# Altium PCB carrier_card.PcbDoc (part 2 of 2)
Units mil, origin at the board's own origin, x right, y up, seen from the top; angles counter-clockwise.
Board outline 4010 x 3799.91 mil, 4 copper layers (Top Layer, GND, VCC, Bottom Layer), stack 30.634 mil thick; 96 components, 162 nets, 584 pads, 200 vias.
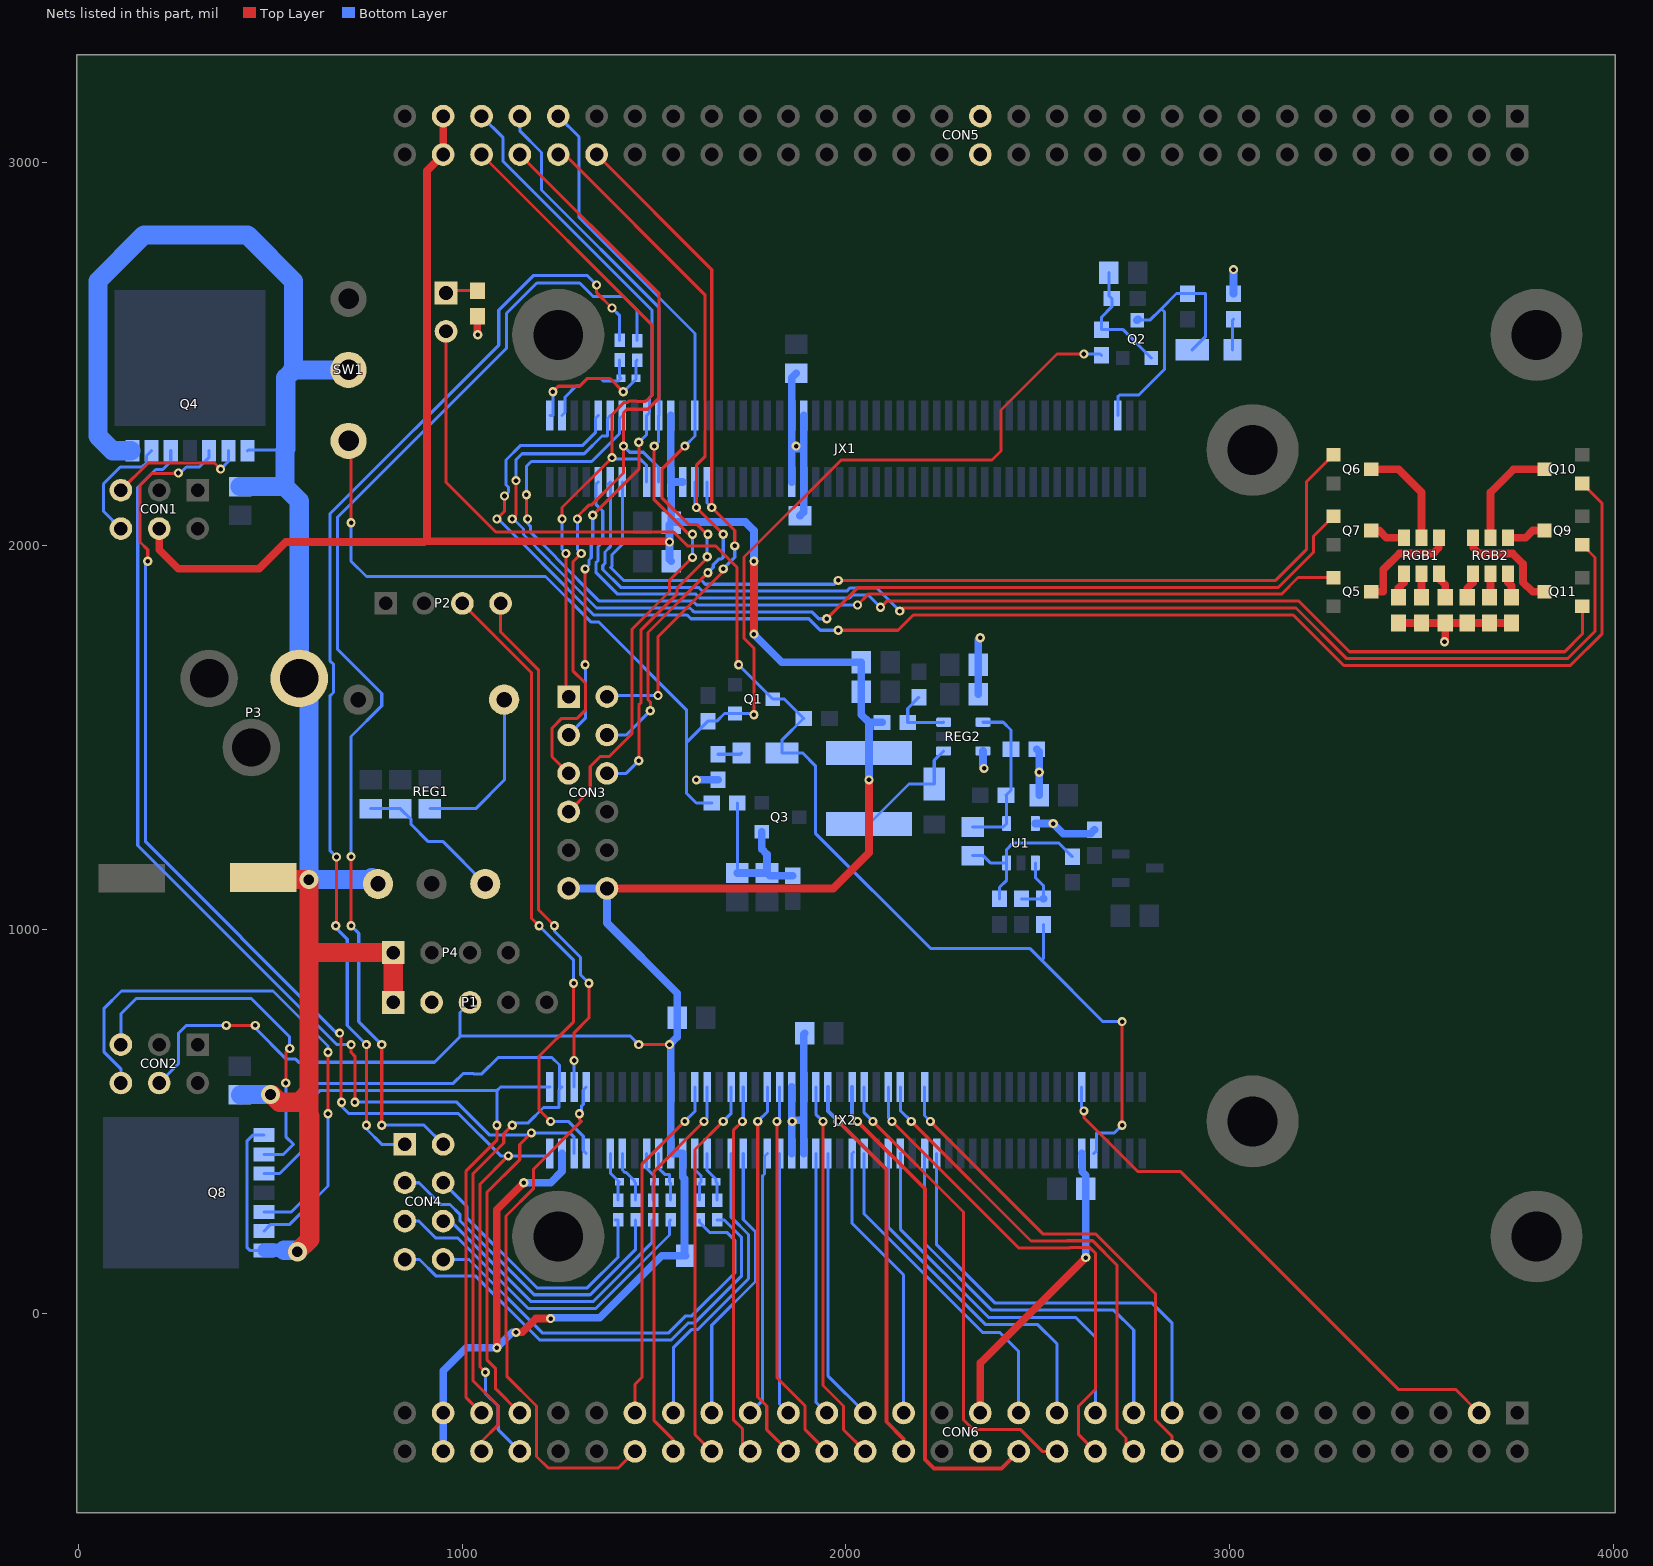
[diagram p4: the nets of this part, all layers, seen from the top]

## Via types
v1: diameter 24, hole 12, Top Layer to Bottom Layer, 192 vias
v2: diameter 50, hole 28, Top Layer to Bottom Layer, 8 vias

## Nets (pads, with @x,y where several pads share a name; then routed paths per layer and width w, separated by ;. In a path a pad name is that pad's centre, name@x,y a point inside that pad or via, vN(x,y) a via of type N, cw(c..) or ccw(c..) an arc to the next point about the centre after c; other vN are vias at no path point) (continued)
JX2_IO13: CON6.19 JX2.36 | length 1170.2
  Bottom Layer w8: JX2.36@2236.22,416.12 2236.22,178.33 2387.54,27 2797,27 2850,-26 CON6.19@2850,-260
JX2_IO14: CON6.20 JX2.37 | length 1297.7
  Top Layer w8: v1(2220,500) 2514,206 2568.23,206 2569.03,206.8 2650.48,206.8 2806.47,50.81 2806.47,-278.03 2850,-321.56 CON6.20@2850,-360
  Bottom Layer w8: JX2.37@2204.72,589.35 2204.72,515.28 v1(2220,500)
JX2_IO15: CON6.21 JX2.38 | length 1088.5
  Bottom Layer w8: JX2.38@2204.72,416.12 2204.72,182.95 2379.67,8 2698,8 2750,-44 CON6.21@2750,-260
JX2_IO16: CON6.22 JX2.41 | length 1296.8
  Top Layer w8: v1(2170,500) 2482,188 2575.68,188 2576.48,188.8 2643.03,188.8 2706.47,125.36 2706.47,-301.56 2730,-325.09 2730,-340 CON6.22@2750,-360
  Bottom Layer w8: JX2.41@2141.73,589.35 2141.73,528.27 v1(2170,500)
JX2_IO17: CON6.23 JX2.42 | length 1029.2
  Bottom Layer w8: JX2.42@2148.38,422.78 JX2.42@2141.73,416.12 2141.73,219.07 2371.8,-11 2599,-11 2650,-62 CON6.23@2650,-260
JX2_IO18: CON6.24 JX2.43 | length 1319.5
  Top Layer w8: v1(2120,500) 2450,170 2583.14,170 2583.94,170.8 2635.57,170.8 2650.8,155.57 2650.8,-197.64 2606.47,-241.97 2606.47,-316.47 CON6.24@2650,-360
  Bottom Layer w8: JX2.43@2110.23,589.35 2110.23,509.77 v1(2120,500)
JX2_IO19: CON6.25 JX2.44 | length 938
  Bottom Layer w8: JX2.44@2110.23,416.12 2110.23,223.7 2363.93,-30 2500,-30 2550,-80 CON6.25@2550,-260
JX2_IO20: CON6.26 JX2.47 | length 1252.2
  Top Layer w8: v1(2070,500) 2306.47,263.53 2306.47,-278.03 2331.97,-303.53 2455.08,-303.53 2511.56,-360 CON6.26@2550,-360
  Bottom Layer w8: JX2.47@2047.24,589.35 2047.24,522.76 v1(2070,500)
JX2_IO21: CON6.27 JX2.48 | length 868.9
  Bottom Layer w8: JX2.48@2047.24,416.12 2047.24,258.41 2355.65,-50 2400,-50 2450,-100 CON6.27@2450,-260
JX2_IO22: CON6.28 JX2.49 | length 1321.6
  Top Layer w10: v1(2030,500) 2205.47,324.53 2205.47,-380.94 2229.06,-404.53 2405.47,-404.53 CON6.28@2450,-360
  Bottom Layer w10: JX2.49@2015.75,589.35 2015.75,514.25 v1(2030,500)
JX2_IO23: CON6.33 JX2.50 | length 737.7
  Bottom Layer w8: JX2.50@2020,420.38 JX2.50@2015.75,416.12 2015.75,234.25 2150,100 CON6.33@2150,-260
JX2_IO24: CON6.34 JX2.53 | length 1031.1
  Top Layer w10: v1(1980,500) 2105.47,374.53 2105.47,-282.97 2150,-327.5 CON6.34@2150,-360
  Bottom Layer w10: JX2.53@1952.75,589.35 1952.75,527.25 v1(1980,500)
JX2_IO25: CON6.35 JX2.54 | length 716.4
  Bottom Layer w8: JX2.54@1952.75,416.12 1952.75,-162.75 CON6.35@2050,-260
JX2_IO26: CON6.36 JX2.55 | length 1002.7
  Top Layer w8: v1(1940,500) 1940,-188.44 1993.53,-241.97 1993.53,-303.53 CON6.36@2050,-360
  Bottom Layer w8: JX2.55@1921.26,589.35 1921.26,518.74 v1(1940,500)
JX2_IO27: CON6.37 JX2.56 | length 688
  Bottom Layer w8: JX2.56@1921.26,416.12 1921.26,-231.26 CON6.37@1950,-260
JX2_IO28: CON6.38 JX2.61 | length 1006
  Top Layer w8: v1(1820,500) 1820,-168.44 1893.53,-241.97 1893.53,-303.53 CON6.38@1950,-360
  Bottom Layer w8: v1(1820,500) 1826.77,506.77 JX2.61@1826.77,589.35
JX2_IO29: CON6.39 JX2.62 | length 685.7
  Bottom Layer w8: JX2.62@1826.77,416.12 1826.77,-236.77 CON6.39@1850,-260
JX2_IO30: CON6.40 JX2.63 | length 993
  Top Layer w8: v1(1770,500) 1770,-218.44 1793.53,-241.97 1793.53,-303.53 CON6.40@1850,-360
  Bottom Layer w8: v1(1770,500) 1795.27,525.27 JX2.63@1795.27,589.35
JX2_IO31: CON6.41 JX2.64 | length 694.9
  Bottom Layer w8: CON6.41@1750,-260 1782,-228 1782,357.13 1787.62,362.75 1787.62,408.47 JX2.64@1795.27,416.12
JX2_IO32: CON6.42 JX2.67 | length 978.1
  Top Layer w8: v1(1730,500) 1706.47,476.47 1706.47,-278.03 1730,-301.56 1730,-340 CON6.42@1750,-360
  Bottom Layer w8: v1(1730,500) 1732.28,502.28 JX2.67@1732.28,589.35
JX2_IO33: CON6.43 JX2.68 | length 736.5
  Bottom Layer w8: CON6.43@1650,-260 1650,-31.5 1764,82.5 1764,212.37 1732.28,244.09 JX2.68@1732.28,416.12
JX2_IO34: CON6.44 JX2.69 | length 1006.4
  Top Layer w8: CON6.44@1650,-360 1606.47,-316.47 1606.47,426.47 v1(1680,500)
  Bottom Layer w8: v1(1680,500) 1700.78,520.78 JX2.69@1700.78,589.35
JX2_IO35: CON6.45 JX2.70 | length 785.4
  Bottom Layer w8: CON6.45@1550,-260 1550,-90 1597,-43 1613.04,-43 1746,89.96 1746,204.91 1700.78,250.13 JX2.70@1700.78,416.12
JX2_IO36: CON6.46 JX2.73 | length 1027.1
  Top Layer w8: CON6.46@1550,-360 1550,-330 1500,-280 1500,370 v1(1630,500)
  Bottom Layer w8: v1(1630,500) 1637.79,507.79 JX2.73@1637.79,589.35
JX2_IO37: CON6.47 JX2.75 | length 914.1
  Top Layer w8: CON6.47@1450,-260 1450,-185.46 1468,-167.46 1468,388 v1(1580,500)
  Bottom Layer w8: v1(1580,500) 1606.3,526.3 JX2.75@1606.3,589.35
JX2_IO38: CON6.48 JX2.93 | length 1376.3
  Top Layer w8: v1(1305.18,520) 1305.18,504.82 1310,500 1186,376 1186,325.51 1114,253.51 1114,-60.77 1116,-62.77 1116,-164.44 1193.53,-241.97 1193.53,-373.53 1223.53,-403.53 1406.47,-403.53 CON6.48@1450,-360
  Bottom Layer w8: v1(1305.18,520) 1310.36,520 1310.36,539.36 1315.18,544.18 1315.18,581.7 JX2.93@1322.83,589.35
JX2_TP00: JX2.94 P2.3 | length 1669.4
  Top Layer w8: P2.3@1000,1850 1180,1670 1180,1030 v1(1200,1010) ; v1(1230,500) 1200,530 1200,670 1290,760 v1(1290,860)
  Bottom Layer w8: v1(1200,1010) 1290,920 v1(1290,860) ; v1(1230,500) 1276.47,500 1315.18,461.29 1315.18,423.78 JX2.94@1322.83,416.12
JX2_TP01: JX2.95 P2.4 | length 1371.9
  Top Layer w8: P2.4@1100,1850 1100,1775.46 1198,1677.46 1198,1052 v1(1240,1010) ; v1(1291.34,658.66) 1291.34,731.34 1330,770 v1(1330,860)
  Bottom Layer w8: v1(1240,1010) 1240,995.46 1308,927.46 1308,882 v1(1330,860) ; JX2.95@1291.34,589.35 v1(1291.34,658.66)
M0_PWM0: CON6.53 JX2.96 Q4.5 | length 3470.4
  Top Layer w8: v1(710,700) 710,680 720,670 v1(720,550) ; CON6.53@1150,-260 1086,-196 1086,-143.23 1064,-121.23 1064,314.67 1149.67,400.33 1149.67,439.67 v1(1180,470)
  Bottom Layer w8: Q4.5@240,2247.87 240,2220 218.99,2198.99 201.01,2198.99 154,2151.97 154,1219.23 673.23,700 v1(710,700) ; v1(720,550) 985.46,550 1071.46,464 1174,464 v1(1180,470) 1280,470 1291.34,458.66 JX2.96@1291.34,416.12
M0_PWM1: CON6.54 JX2.100 Q4.3 | length 3542.6
  Top Layer w8: v1(180,1960) 180,1990 160,2010 160,2157.97 190.56,2188.53 248.03,2188.53 246.56,2190 v1(260,2190) ; v1(680,730) 684,726 684,551.36 v1(685.36,550) ; v1(1060,-154) 1046,-140 1046,336 v1(1120,410) ; v1(260,2190) 260,2184.73 257.37,2187.37 v1(260,2190)
  Bottom Layer w8: v1(180,1960) 174.53,1954.53 174.53,1228.4 672.93,730 v1(680,730) ; v1(260,2190) 260,2184.73 280.58,2205.32 314.52,2205.32 340,2230.8 Q4.3@340,2247.87 ; v1(685.36,550) 680,544.64 704.64,520 990,520 1100,410 v1(1120,410) 1222.22,410 JX2.100@1228.34,416.12 ; v1(1060,-154) 1060,-208.44 1093.53,-241.97 1093.53,-303.53 CON6.54@1150,-360
M1_PWM0: CON6.55 JX2.99 Q8.5 | length 1916.6
  Top Layer w8: CON6.55@1050,-260 1010,-220 1010,371.01 1090,451.01 v1(1090,490)
  Bottom Layer w8: Q8.5@483,263.95 553.95,263.95 602.07,312.07 602.07,553.79 629.28,581 1090,581 ; v1@1093.23,490 v1(1090,490) 1090,581 ; JX2.99@1227.69,590 JX2.99@1228.34,589.35 1099.35,589.35 1091,581 1090,581
M1_PWM1: CON6.56 JX2.97 Q8.3 | length 2185.4
  Top Layer w8: CON6.56@1050,-360 1050,-334.31 1093.53,-290.78 1093.53,-241.97 1028,-176.44 1028,363.55 1108,443.55 1108,468 v1(1130,490)
  Bottom Layer w8: Q8.3@483,363.95 523.95,363.95 580,420 580,560 619,599 976.24,599 1001.6,624.36 1028.87,624.36 1029.23,624 1050.77,624 1093.43,666.66 1233.34,666.66 1253.19,646.81 1253.19,589.35 JX2.97@1259.84,589.35 1252.19,581.7 1252.19,535.98 1211.74,535.98 1171.76,496 1136,496 v1(1130,490)
MIC_CM_CLK: CON3.7 CON5.50 JX1.74 | length 1847.9
  Top Layer w8: CON5.50@1350,3020 1650,2720 v1(1650,2100) 1710,2040 v1(1710,2000) ; v1(1510,1610) 1510,1763.23 1680,1933.23 v1(1680,1940)
  Bottom Layer w8: CON3.7@1377,1607 1380,1610 v1(1510,1610) ; JX1.74@1637.79,2166.62 1637.79,2112.21 v1(1650,2100) ; v1(1680,1940) 1710,1970 v1(1710,2000)
MIC_DATA0: CON3.4 CON5.53 JX1.81 | length 2163.3
  Top Layer w8: CON3.4@1277,1307 1333.47,1363.47 1333.47,1425.03 1358.97,1450.53 1382.09,1450.53 1442,1510.44 1442,1782.91 1540,1880.91 1540,1910 v1(1600,1970) ; v1(1500,2260) 1500,2120 1590,2030 v1(1600,2030)
  Bottom Layer w8: CON5.53@1150,3120 1150,3081.56 1206.47,3025.08 1206.47,2927.43 1512.88,2621.01 1512.88,2340.93 JX1.81@1511.81,2339.85 1511.81,2271.81 v1(1500,2260) ; v1(1600,1970) v1(1600,2030)
MIC_DATA1: CON3.3 CON5.54 JX1.82 | length 2143.9
  Top Layer w8: CON5.54@1150,3020 1512.88,2657.11 1512.88,2385.85 1483.04,2356 1429.35,2356 1420,2346.65 v1(1420,2260) 1420,2190 1336,2106 1329.23,2106 1300,2076.77 v1(1300,2070) ; CON3.3@1277,1407 1233.47,1450.53 1233.47,1525.03 1258.97,1550.53 1299.38,1550.53 1320.53,1571.67 1320.53,1642.33 1288,1674.85 1288,1958 v1(1310,1980)
  Bottom Layer w8: v1(1300,2070) 1300,1990 v1(1310,1980) ; v1(1420,2260) 1436,2244 1471.95,2244 1511.81,2204.14 JX1.82@1511.81,2166.62
MIC_DATA2: CON3.2 CON5.55 JX1.83 | length 1888
  Top Layer w8: v1(1320,1690) v1(1320,1940) ; v1(1340,2080) 1460,2200 v1(1460,2270)
  Bottom Layer w8: CON5.55@1050,3120 1106.47,3063.53 1106.47,3001.97 1494.88,2613.56 1494.88,2393.3 1487.96,2386.38 1487.96,2347.5 JX1.83@1480.31,2339.85 1480.31,2290.31 v1(1460,2270) ; CON3.2@1277,1507 1320.53,1550.53 1320.53,1689.47 v1(1320,1690) ; v1(1320,1940) 1330,1950 1330,1963.23 1336,1969.23 1336,2005.68 1340,2009.68 v1(1340,2080)
MIC_DATA3: CON3.1 CON5.56 JX1.84 | length 1875.9
  Top Layer w8: CON5.56@1050,3020 1494.88,2575.11 1494.88,2393.3 1478.79,2377.21 1475.96,2377.21 1474.75,2376 1454.87,2376 1453.67,2377.21 1433.98,2377.21 1430.77,2374 1421.89,2374 1390,2342.11 v1(1390,2230) 1260,2100 v1(1260,2070) ; v1(1270,1980) 1270,1614 CON3.1@1277,1607
  Bottom Layer w8: v1(1260,2070) 1260,1990 v1(1270,1980) ; v1(1390,2230) 1394,2226 1464,2226 1480.31,2209.69 JX1.84@1480.31,2166.62
MIC_SCL: CON3.9 CON5.51 JX1.75 | length 2098.6
  Top Layer w8: v1(1460,1440) 1460,1585.77 1466,1591.77 1466,1781.46 1560,1875.46 1560,1890 1638.23,1968.23 v1(1638.23,1971.77) ; v1(1580,2260) 1520,2200 1520,2125.46 1589.46,2056 1610.77,2056 1636.77,2030 v1(1640,2030)
  Bottom Layer w8: CON5.51@1250,3120 1304,3066 1304,2856 1606.3,2553.7 JX1.75@1606.3,2339.85 1606.3,2286.3 v1(1580,2260) ; CON3.9@1377,1407 1427,1407 v1(1460,1440) ; v1(1638.23,1971.77) 1638.23,2028.23 v1(1640,2030)
MIC_SDA: CON3.8 CON5.52 JX1.76 | length 1951
  Top Layer w8: CON5.52@1250,3020 1266.77,3020 1632,2654.77 1632,2232 1610,2210 v1(1610,2100) v1(1680,2030) ; v1(1490,1570) 1490,1593.23 1484,1599.23 1484,1774 v1(1640,1930)
  Bottom Layer w8: CON3.8@1377,1507 1427,1507 v1(1490,1570) ; JX1.76@1606.3,2166.62 1606.3,2103.7 v1(1610,2100) ; v1(1640,1930) 1654,1944 1654,1950.77 1669.23,1966 1676,1966 1680,1970 v1(1680,2030)
NetC15_1: C15.1 R1.1 R5.2 U1.3 | length 425.3
  Bottom Layer w8: C15.1@2330,1192.6 2357.4,1192.6 2376.18,1173.82 U1.3@2418.6,1173.82 ; R5.2@2400,1080.08 2400,1110 2418.6,1128.6 U1.3@2418.6,1173.82 ; R1.1@2590,1190 2555,1225 2435,1225 2418.6,1208.6 U1.3@2418.6,1173.82
NetC18_2: C18.2 Q2.1 R12.1 R15.2 | length 323.6
  Bottom Layer w8: C18.2@2685.2,2711.81 2685.2,2652.46 R15.2@2693.07,2644.59 2693.07,2623.07 2665.79,2595.79 R12.1@2665.79,2563.46 2722.3,2563.46 Q2.1@2796,2489.77
NetC19_2: C19.2 C20.2 Q3.1 R13.1 R16.2 | length 443.5
  Bottom Layer w8: C19.2@1716.84,1147.4 1716.84,1329.91 R13.1@1716.93,1330
  Bottom Layer w20: C19.2@1716.84,1147.4 C20.2@1793.9,1147.4 ; Q3.1@1780,1255.2 1780,1210 1793.9,1196.1 C20.2@1793.9,1147.4 ; R16.2@1861.12,1140 1801.3,1140 C20.2@1793.9,1147.4
NetC22_1: C22.1 JX2.88 R23.2 | length 137.8
  Bottom Layer w8: JX2.88@1417.32,416.12 1417.32,373.28 1423.71,366.9 1427.2,366.9 1448.55,345.55 C22.1@1448.55,342.06 1451.75,338.86 R23.2@1451.75,294.58
NetC22_2: C22.2 JX2.90 R21.2 | length 132.5
  Bottom Layer w8: JX2.90@1385.82,416.12 1385.82,365.41 C22.2@1409.18,342.06 1406.18,339.06 R21.2@1406.18,294.58
NetC24_1: C24.1 JX2.82 R27.2 | length 141.9
  Bottom Layer w8: JX2.82@1511.81,416.12 1511.81,377.19 1527.25,361.75 1540,361.75 C24.1@1540,342.06 1542.88,339.17 R27.2@1542.88,294.58
NetC24_2: C24.2 JX2.84 R25.2 | length 131.3
  Bottom Layer w8: JX2.84@1480.31,416.12 1480.31,377.19 1500.63,356.87 C24.2@1500.63,342.06 1497.32,338.74 R25.2@1497.32,294.58
NetC25_1: C25.1 JX2.74 R30.2 | length 132.4
  Bottom Layer w8: JX2.74@1637.79,416.12 1637.79,372.21 1661.21,348.79 C25.1@1661.21,342.06 1664.02,339.24 R30.2@1664.02,294.58
NetC25_2: C25.2 JX2.76 R28.2 | length 129.4
  Bottom Layer w8: JX2.76@1606.3,416.12 1606.3,373.7 1621.84,358.16 C25.2@1621.84,342.06 1618.45,338.67 R28.2@1618.45,294.58
NetC27_1: C27.1 JX1.97 R34.2 | length 271.3
  Bottom Layer w8: JX1.97@1259.84,2339.85 1267.49,2347.5 1267.49,2387.49 1296,2416 1305.5,2416 1325.5,2436 1360.77,2436 1366.77,2430 1406.91,2430 C27.1@1413.38,2436.47 1410,2439.86 R34.2@1410,2484.44
NetC27_2: C27.2 JX1.99 R32.2 | length 378.9
  Top Layer w8: v1(1236,2401.64) 1250.36,2416 1305.5,2416 1325.5,2436 1385.22,2436 v1(1419.46,2401.76)
  Bottom Layer w8: JX1.99@1228.34,2339.85 1236,2339.85 v1(1236,2401.64) ; v1(1419.46,2401.76) 1420.12,2401.76 1452.75,2434.39 C27.2@1452.75,2436.47 1452.75,2481.13 R32.2@1455.57,2483.95
NetCON1_5: CON1.5 Q4.2 | length 352.2
  Top Layer w8: CON1.5@110,2145 181,2216 354,2216 v1(370,2200)
  Bottom Layer w8: v1(370,2200) 390,2220 Q4.2@390,2247.87
NetCON1_6: CON1.6 Q4.6 | length 306
  Bottom Layer w8: CON1.6@110,2045 64.96,2090.04 64.96,2161.52 108.76,2205.32 164.52,2205.32 176.69,2217.49 176.69,2234.57 Q4.6@190,2247.87
NetCON2_5: CON2.5 Q8.2 | length 958.2
  Top Layer w8: v1(540,600) 540,680 v1(550,690)
  Bottom Layer w8: CON2.5@110,700 110,780 150,820 450,820 550,720 v1(550,690) ; Q8.2@483,413.95 533.95,413.95 560,440 540,460 v1(540,600)
NetCON2_6: CON2.6 Q8.6 | length 1455.8
  Top Layer w8: v1(650,520) v1(650,680)
  Bottom Layer w8: CON2.6@110,600 110,637.03 65.47,681.56 65.47,793.76 111.72,840 506.36,840 650,696.36 v1(650,680) ; Q8.6@483,213.95 499.69,230.64 548.92,230.64 650,331.72 v1(650,520)
NetCON4_1: CON4.1 R34.1 | length 2962.7
  Top Layer w8: v1(670,1010) 672,1012 v1(672,1189.17) ; v1(750,490) v1(750,700) v1@756,694 ; v1(1350,2680) 1350,2660 v1(1390,2620)
  Bottom Layer w8: v1(670,1010) 670,1004.64 700,974.64 700,750 v1(750,700) ; v1(672,1189.17) 654.69,1206.49 654.69,1608.32 664,1617.64 664,1691.37 654.69,1700.68 654.69,2082.97 1095,2523.28 1095,2614.2 1185.8,2705 1325,2705 v1(1350,2680) ; v1(750,490) 750,480 790,440 CON4.1@850,440 ; v1(1390,2620) 1410,2600 R34.1@1410,2535.62
NetCON4_2: CON4.2 R32.1 | length 3074.9
  Top Layer w8: v1(710,1010) v1(710,1190) ; v1(790,490) v1(790,700)
  Bottom Layer w8: v1(710,1010) 730,990 730,760 v1(790,700) ; v1(710,1190) 710,1503.21 790,1583.21 790,1615.1 674.69,1730.42 674.69,2074.69 1115,2515 1115,2605.92 1194.08,2685 1305.92,2685 1340.92,2650 1420,2650 1455.57,2614.43 R32.1@1455.57,2535.13 ; v1(790,490) 900,490 CON4.2@950,440
NetCON4_3: CON4.3 R23.1 | length 858.3
  Bottom Layer w8: CON4.3@850,340 887.03,340 931.56,295.47 943.5,283.53 968.03,283.53 993.53,258.03 993.53,241.51 1187.04,48 1333.09,48 1451.75,166.66 R23.1@1451.75,243.4
NetCON4_4: CON4.4 R21.1 | length 735.8
  Bottom Layer w8: CON4.4@950,330 CON4.4@950,340 1011.53,278.47 1011.53,248.97 1194.49,66 1325.63,66 1406.18,146.55 R21.1@1406.18,243.4 R21.1@1397.52,243.4
NetCON4_5: CON4.5 R27.1 | length 904.6
  Bottom Layer w8: CON4.5@850,240 887.03,240 931.56,195.47 988.66,195.47 1172.13,12 1348,12 1540,204 1540,240.52 R27.1@1542.88,243.4
NetCON4_6: CON4.6 R25.1 | length 755.9
  Bottom Layer w8: CON4.6@950,240 969.58,240 1179.58,30 1340.54,30 1493.91,183.37 1493.91,240 R25.1@1497.32,243.4
NetCON4_7: CON4.7 R30.1 | length 1217.4
  Bottom Layer w8: CON4.7@850,140 888.44,140 931.97,96.47 1035.33,96.47 1201.8,-70 1544.54,-70 1589.54,-25 1605.59,-25 1728,97.41 1728,197.46 1682.06,243.4 R30.1@1664.02,243.4
NetCON4_8: CON4.8 R28.1 | length 1107.5
  Bottom Layer w8: CON4.8@950,140 1017.26,140 1209.26,-52 1537.09,-52 1582.09,-7 1598.13,-7 1710,104.87 1710,190 1689.32,210.68 1644.03,210.68 1618.45,236.26 R28.1@1618.45,243.4
NetD1_2: D1.2 L1.1 REG2.1 | length 309.9
  Bottom Layer w8: L1.1@2059.85,1274.96 2163.97,1379.08 D1.2@2230,1379.08 2230,1440.9 REG2.1@2254.59,1465.5
NetD3_1: D3.1 R17.2 | length 62.6
  Bottom Layer w8: R17.2@1666.59,1456.93 1724.9,1456.93 D3.1@1727.91,1459.93
NetD4_1: D4.1 R19.2 | length 80.6
  Bottom Layer w8: D4.1@3007.53,2511 3007.53,2588.13 R19.2@3010,2590.6
NetJ1_1: J1.1 R10.1 | length 84.4
  Top Layer w8: J1.1@957.49,2659 963.86,2665.37 R10.1@1039.21,2665.37
NetJX1_87: JX1.87 Q5.1 | length 2705.7
  Top Layer w8: v1(1166.91,2133.09) 1166.91,2073.09 v1(1170,2070) ; v1(2030,1846) 2058,1874 3134.91,1874 3178.31,1917.4 Q5.1@3270.79,1917.4
  Bottom Layer w8: v1(1166.91,2133.09) 1166.91,2206.91 1180,2220 1337.15,2220 1409.67,2292.52 1409.67,2332.2 JX1.87@1417.32,2339.85 ; v1(1170,2070) 1170,2058.69 1177.23,2051.46 1177.23,2036.91 1244,1970.14 1244,1969.23 1357.23,1856 1600.86,1856 1610.86,1846 v1(2030,1846)
NetJX1_88: JX1.88 Q6.1 | length 2381.4
  Top Layer w8: v1(1980,1910) 3120,1910 3200,1990 3200,2166.61 Q6.1@3270.79,2237.4
  Bottom Layer w8: JX1.88@1417.32,2166.62 1417.32,2004.09 1390,1976.77 1390,1946.86 1386.57,1943.43 1420,1910 1623.23,1910 1633.23,1900 1970,1900 v1(1980,1910)
NetJX1_89: JX1.89 Q7.1 | length 2878.8
  Top Layer w8: v1(1130,2070) 1140,2080 v1(1140,2170) ; v1@1943.23,1810 v1(1950,1810) 2032,1892 3127.46,1892 3218,1982.54 3218,2024.61 Q7.1@3270.79,2077.4
  Bottom Layer w8: v1(1130,2070) 1133.23,2070 1159.23,2044 1159.23,2029.46 1226,1962.69 1226,1961.77 1349.77,1838 1593.41,1838 1603.41,1828 1910.69,1828 1928.69,1810 v1(1950,1810) ; v1(1140,2170) 1140,2224.54 1155.46,2240 1317.45,2240 1363.93,2286.48 1378.17,2286.48 1378.17,2332.2 JX1.89@1385.82,2339.85
NetJX1_90: JX1.90 Q9.1 | length 3211
  Top Layer w8: v1(2140,1830) 2148,1838 3173.09,1838 3305.09,1706 3880.54,1706 3952,1777.46 3952,1969.81 Q9.1@3919.21,2002.6
  Bottom Layer w8: JX1.90@1378.17,2158.97 JX1.90@1385.82,2166.62 1385.82,1998.05 1372,1984.23 1372,1954.32 1366,1948.32 1366,1938.54 1412.54,1892 1615.77,1892 1625.77,1882 2002,1882 2010,1890 2080,1890 v1(2140,1830)
NetJX1_91: JX1.91 Q10.1 | length 3998.7
  Top Layer w8: v1(1090,2070) 1110,2090 v1(1110,2130) ; v1(1980,1780) 2135.46,1780 2175.46,1820 3165.63,1820 3297.63,1688 3888,1688 3970,1770 3970,2111.81 Q10.1@3919.21,2162.6
  Bottom Layer w8: v1(1090,2070) 1093.23,2070 1208,1955.23 1208,1954.32 1342.32,1820 1585.95,1820 1595.95,1810 1903.23,1810 1933.23,1780 v1(1980,1780) ; v1(1110,2130) 1120,2140 1120,2153.23 1114,2159.23 1114,2224 1152,2262 1313.99,2262 1346.67,2294.68 1346.67,2332.2 JX1.91@1354.33,2339.85
NetJX1_92: JX1.92 Q11.1 | length 3021.5
  Top Layer w8: v1(2090,1840) 2106,1856 3180.54,1856 3312.54,1724 3873.09,1724 3919.21,1770.12 Q11.1@3919.21,1842.6
  Bottom Layer w8: JX1.92@1354.33,2166.62 1348,2160.3 1348,2108.77 1366,2090.77 1366,2010.23 1354,1998.23 1354,1961.77 1348,1955.77 1348,1931.09 1405.09,1874 1608.32,1874 1618.32,1864 2009.46,1864 2017.46,1872 2058,1872 v1(2090,1840)
NetQ5_3: Q5.3 RGB1.1 | length 284.3
  Top Layer w20: Q5.3@3369.21,1880 3400.31,1880 3400.31,1938.34 3441.87,1979.9 3529.9,1979.9 3545.28,1995.28 RGB1.1@3545.28,2021.55
NetQ6_3: Q6.3 RGB1.2 | length 274.1
  Top Layer w20: Q6.3@3369.21,2200 3440,2200 3500,2140 RGB1.2@3500,2021.55
NetQ7_3: Q7.3 RGB1.3 | length 93.2
  Top Layer w20: Q7.3@3369.21,2040 3390,2040 3408.45,2021.55 RGB1.3@3454.72,2021.55
NetQ9_3: Q9.3 RGB2.1 | length 103.2
  Top Layer w20: RGB2.1@3725.28,2021.55 3771.55,2021.55 3790,2040 Q9.3@3820.79,2040
NetQ10_3: Q10.3 RGB2.2 | length 284.1
  Top Layer w20: RGB2.2@3680,2021.55 3680,2140 3740,2200 Q10.3@3820.79,2200
NetQ11_3: Q11.3 RGB2.3 | length 288.4
  Top Layer w20: RGB2.3@3634.72,2021.55 3634.72,1995.28 3650.1,1979.9 3738.13,1979.9 3764.38,1953.65 3764.38,1905.37 3789.75,1880 Q11.3@3820.79,1880
NetR3_2: R3.2 R7.2 U1.1 | length 160
  Bottom Layer w8: R7.2@2457.38,1080 R3.2@2514.68,1080 ; U1.1@2493.4,1173.82 2493.4,1135.43 2514.76,1114.07 R3.2@2514.76,1080.08
  Bottom Layer w20: R3.2@2514.68,1080 R3.2@2514.76,1080.08
NetR4_2: R4.2 R8.2 REG2.3 | length 171
  Bottom Layer w8: R8.2@2190,1605.06 2160.86,1575.92 R4.2@2160.86,1540 2254.29,1540 REG2.3@2254.59,1540.3
NetR9_2: R9.2 REG1.4 | length 435.1
  Bottom Layer w8: R9.2@915.5,1315.2 1035.2,1315.2 1110,1390 1110,1598.14 REG1.4@1108.98,1599.16
NetR22_1: R22.1 RGB1.6 | length 68.2
  Top Layer w20: RGB1.6@3545.28,1927.07 3545.28,1914.72 3561.88,1898.12 R22.1@3561.88,1865.75
NetR24_1: R24.1 RGB1.5 | length 61.3
  Top Layer w20: R24.1@3500,1865.75 RGB1.5@3500,1927.07
NetR26_1: R26.1 RGB1.4 | length 67.4
  Top Layer w20: R26.1@3440,1865.75 3440,1890 3454.72,1904.72 RGB1.4@3454.72,1927.07
NetR29_1: R29.1 RGB2.6 | length 65.1
  Top Layer w20: RGB2.6@3725.28,1927.07 3725.28,1904.72 3734.38,1895.62 R29.1@3734.38,1865.75
NetR31_1: R31.1 RGB2.5 | length 62.6
  Top Layer w20: R31.1@3677,1865.75 3680,1868.75 RGB2.5@3680,1927.07
NetR33_1: R33.1 RGB2.4 | length 67.7
  Top Layer w20: R33.1@3619.26,1865.75 3619.26,1889.26 3634.72,1904.72 RGB2.4@3634.72,1927.07
PG_MODULE: CON6.3 JX2.11 | length 1430.7
  Top Layer w8: v1@2620,530 v1(2620,527.33) 2620,510 2761.2,368.8 2872.11,368.8 3439.38,-198.47 3588.47,-198.47 CON6.3@3650,-260
  Bottom Layer w8: JX2.11@2614.17,589.35 2614.17,535.83 v1@2620,530
POWER_EN: D4.2 JX1.5 Q2.3 R20.2 | length 734.3
  Bottom Layer w8: JX1.5@2708.66,2339.85 2708.66,2388.66 2713.22,2393.22 2763.22,2393.22 2830,2460 2830,2610 2823.87,2616.13 2820,2616.13 ; Q2.3@2758.6,2588.19 2792.06,2588.19 2820,2616.13 ; D4.2@2902.53,2511 2937.53,2546 2937.53,2657.53 R20.2@2890,2657.53 2861.4,2657.53 2820,2616.13
  Bottom Layer w20: Q2.3@2758.6,2588.19 Q2.3@2761.01,2590.6
V_OFF: Q1.1 R12.2 R13.2 R14.2 SW1.1 | length 3489.4
  Top Layer w8: SW1.1@703.5,2273.46 710,2266.96 v1(710,2060) ; v1(1760,1560) 1760,1733.23 1734,1759.23 1734,1970.77 1987.23,2224 2380.77,2224 2404,2247.23 2404,2354 2550,2500 v1(2620,2500)
  Bottom Layer w8: v1(710,2060) 710,1960 750,1920 1216.86,1920 1334.86,1802 1354.77,1802 1584,1572.77 1584,1487.07 ; R13.2@1650,1330 1610,1330 1584,1356 1584,1487.07 ; v1(1760,1560) 1756.91,1563.09 Q1.1@1710.79,1563.09 1683.09,1563.09 1663.07,1543.07 R14.2@1640,1543.07 1584,1487.07 ; v1(2620,2500) 2662.32,2500 R12.2@2665.79,2496.54
VADJ_EN: C15.2 R2.1 R6.2 REG2.4 U1.4 | length 423.6
  Bottom Layer w8: C15.2@2330,1267.4 2409.82,1267.4 U1.4@2418.6,1276.18 2418.6,1348.33 R6.2@2416.93,1350 2430,1363.07 R2.1@2430,1470 2430,1520 2409.7,1540.3 REG2.4@2356.96,1540.3
VBATT: C12.2 C23.2 C26.2 P1.1 P3.1 P4.1 Q4.1 Q4.7 Q8.1 Q8.7 REG1.1 SW1.2 | length 5367.1
  Top Layer w8: C12.2@480.76,1135.5 C12.2@481.26,1135
  Top Layer w50: C12.2@481.26,1135 486.26,1130 v2(600,1130) 600,940 ; v2(500,570) 503.53,570 523.53,550 573.53,550 593,569.47 ; v2(570,160) 602.07,192.07 602.07,513.93 600,516 600,940 ; P1.1@820,810 P4.1@820,940 600,940
  Bottom Layer w8: C26.2@422,569.1 C26.2@422.81,568.29 ; Q4.1@440,2247.87 442.13,2250 537.63,2250 ; Q8.7@483,163.95 446.05,163.95 438.5,171.5 438.5,448.5 453.95,463.95 Q8.1@483,463.95 ; v2@566.05,163.95 v2(570,160)
  Bottom Layer w35: Q8.7@483,163.95 536.05,163.95
  Bottom Layer w50: Q4.7@136.69,2247.87 88.43,2247.87 50,2286.3 50,2690 170,2810 440,2810 560,2690 560,2458.5 ; C23.2@421,2154.37 537.63,2154.37 ; C26.2@422,569.1 422.9,570 v2(500,570) ; 536.05,163.95 v2@566.05,163.95 ; SW1.2@703.5,2458.5 560,2458.5 ; REG1.1@780.24,1118.84 764.08,1135 759.08,1130 v2(600,1130) 600,1629.5 P3.1@575,1654.5 575,2117 537.63,2154.37 ; 537.63,2154.37 537.63,2250 539.85,2252.22 539.85,2438.35 560,2458.5
VCC: C1.2 C3.2 C5.2 C7.2 C9.1 C13.2 C14.2 C16.2 C17.2 CON5.29 CON5.30 CON6.29 CON6.30 JX1.57 JX1.58 JX1.59 JX1.60 JX2.12 JX2.57 JX2.58 JX2.59 JX2.60 P1.2 R2.2 R10.2 R11.2 R17.1 R19.1 R22.2 R24.2 R26.2 R29.2 R31.2 R33.2 REG1.3 REG2.5 U1.5 | length 3291.6
  Top Layer w20: R10.2@1039.21,2598.44 1039.21,2550.79 v1(1040,2550) ; CON6.29@2350,-260 2350,-130 v1(2624.8,144.8) ; R26.2@3440,1798.82 R24.2@3500,1798.82 R22.2@3561.88,1798.82 ; v1(3560,1750) 3561.88,1751.88 R22.2@3561.88,1798.82 ; R29.2@3734.38,1798.82 R31.2@3677,1798.82 R33.2@3619.26,1798.82 R22.2@3561.88,1798.82
  Bottom Layer w8: C17.2@761.37,1315.2 C16.2@838.44,1315.2 865.97,1287.66 865.97,1274.03 910,1230 948.61,1230 REG1.3@1059.76,1118.84
  Bottom Layer w20: v1(1610,1390) R17.1@1666.59,1390 ; JX2.60@1858.26,416.12 v1@1858.26,502.74 ; JX2.59@1858.26,589.35 v1@1858.26,502.74 ; JX1.60@1858.26,2166.62 1858.26,2253.24 ; C1.2@1870,2450.32 1858.26,2438.58 JX1.59@1858.26,2339.85 1858.26,2253.24 ; C7.2@1880,2078.71 1889.76,2088.47 JX1.58@1889.76,2166.62 1889.76,2250 ; JX2.58@1889.76,416.12 1889.76,510 ; JX1.57@1889.76,2339.85 1889.76,2250 ; C5.2@1892.6,730 1889.76,727.16 JX2.57@1889.76,589.35 1889.76,510 ; C14.2@2344.8,1612.94 C13.2@2344.8,1690 2344.8,1755.2 v1(2350,1760.4) ; REG2.5@2356.96,1465.5 2356.96,1423.04 v1(2360,1420) ; U1.5@2493.4,1276.18 v1(2540,1276.18) 2566.18,1250 2637.56,1250 R11.2@2647.56,1260 ; R2.2@2496.93,1470 2503.88,1463.05 v1(2503.88,1410) C9.1@2503.88,1350.04 ; JX2.12@2614.17,416.12 2615.82,414.47 2615.82,368.47 2624.8,359.49 C3.2@2624.8,324.28 v1(2624.8,144.8) ; R19.1@3010,2657.53 v1(3010,2720) ; v1@1858.26,502.74 1882.5,502.74 1889.76,510 ; 1858.26,2253.24 1886.52,2253.24 1889.76,2250
  other v1: 1860,500 1870,2260
VCCIO: C2.2 C4.2 C6.2 C8.2 C10.2 C11.2 CON1.4 CON2.4 CON3.6 CON3.12 CON5.57 CON5.58 CON6.57 CON6.58 JX1.78 JX1.79 JX1.80 JX2.78 JX2.79 JX2.80 JX2.98 L1.2 P1.3 R4.1 | length 9431.6
  Top Layer w8: v1(384.65,750) v1(460,750) ; v1(1460,700) v1(1540,700)
  Top Layer w20: CON1.4@210,2045 210,1990 260,1940 470,1940 540,2010 900,2010 902,2012 ; CON5.57@950,3120 CON5.58@950,3020 907.96,2977.96 907.96,2017.96 902,2012 ; v1(1090,-90) 1090,270 v1(1160,340) ; v1(1140,-50) 1155.72,-50 1191.72,-14 v1(1230,-14) ; CON3.12@1377,1107 1967,1107 2060,1200 v1(2060,1390) ; v1(1540,2010) 1538,2012 902,2012 ; v1(1760,1770) v1(1760,1960)
  Bottom Layer w8: CON2.4@210,600 260,650 260,730 280,750 v1(384.65,750) ; v1(460,750) 460,743.23 541.23,662 565.68,662 573.68,654 927.23,654 993.9,720.66 ; P1.3@1020,810 993.9,783.9 993.9,720.66 ; v1(1460,700) 1437.68,722.32 995.55,722.32 993.9,720.66 ; C8.2@1540,2055.2 C8.2@1544.8,2060 ; JX1.80@1543.3,2166.62 1544.8,2165.12 JX1.80@1546.3,2166.62 ; C4.2@1579.16,153.44 C4.2@1582.6,150
  Bottom Layer w20: CON6.58@950,-360 CON6.57@950,-260 950,-150 1010,-90 v1(1090,-90) 1130,-50 v1(1140,-50) ; v1(1160,340) 1230,340 1259.84,369.84 JX2.98@1259.84,416.12 ; v1(1230,-14) 1228,-12 1357.94,-12 1519.94,150 C4.2@1582.6,150 ; CON3.6@1277,1107 CON3.12@1377,1107 1377,1016.94 1560,833.94 C6.2@1560,770 1560,720 v1(1540,700) 1543.3,696.7 JX2.79@1543.3,589.35 JX2.80@1543.3,416.12 JX2.78@1574.8,416.12 1574.8,355.2 1579.16,350.84 C4.2@1579.16,153.44 ; C8.2@1540,2055.2 v1(1540,2010) 1540,1964.8 C2.2@1544.8,1960 ; JX1.80@1543.3,2166.62 JX1.79@1543.3,2339.85 ; JX1.80@1544.8,2165.12 C8.2@1544.8,2060 1546.8,2062 1738,2062 1760,2040 v1(1760,1960) ; JX1.80@1546.3,2166.62 JX1.78@1574.8,2166.62 ; v1(1760,1770) 1832.94,1697.06 C11.2@2040.16,1697.06 C10.2@2040.16,1620 2040.16,1559.84 2060,1540 ; v1(2060,1390) 2059.85,1390.15 L1.2@2059.85,1460 2060,1460.15 2060,1540 ; R4.1@2093.93,1540 2060,1540
VCCIO_EN: D3.2 J1.2 JX2.10 Q1.3 R3.1 R18.2 | length 3617.6
  Top Layer w8: J1.2@957.49,2559 957.49,2165.74 1087.23,2036 1550.77,2036 1586.77,2000 1660,2000 1716,1944 1716,1694 v1(1720,1690) ; v1(2719.54,490) v1(2719.54,760)
  Bottom Layer w8: v1(1720,1690) 1809.21,1600.79 Q1.3@1809.21,1600.5 1839.5,1600.5 R18.2@1890,1550 1889.23,1550 1832.91,1493.68 D3.2@1832.91,1459.93 1887.35,1459.93 1920,1427.29 1920,1251.31 2221.31,950 2480,950 2510,920 ; R3.1@2514.76,1013.16 2514.76,924.76 2510,920 ; JX2.10@2645.67,416.12 2653.32,423.78 2653.32,469.49 2699.04,469.49 v1(2719.54,490) ; v1(2719.54,760) 2670,760 2510,920
pads on no net: CON3.10 JX1.1 JX1.2 JX1.3 JX1.4 JX1.6 JX1.7 JX1.8 JX2.1 JX2.2 JX2.3 JX2.4 JX2.5 JX2.6 JX2.7 JX2.8 JX2.9 Q4.Heatsink Q8.Heatsink REG2.0 SW1.3 U1.0

## Polygon pours and split planes (outlines as drawn)
GND on Top Layer "Top Layer-GND" (solid, shelved, pour order 10): 0,3279.94 3989.89,3279.94 3990,3280.05 4000,3270.05 4000,-520 0,-520
GND on Bottom Layer "Bottom Layer-GND" (solid, shelved, pour order 9): 20.1,-499.9 3979.9,-499.9 3979.9,3259.85 3979.91,3259.85 20.1,3259.85
GND on GND (split plane): 3984.9,-499.9 15.1,-499.9 15.1,3259.79 3984.9,3259.82
VCC on VCC (split plane): 3984.9,-499.9 15.1,-499.9 15.1,3259.79 3984.9,3259.82

## Keep-outs
Keep-Out Layer:
  lines w10: 0,-520 0,3279.94 3989.89,3279.94 3990,3280.05 4000,3280.05 ; 0,-520 0,-520 ; 0,-520 4000,-520 4000,3280.05 ; 4000,3280.05 4000,3280.05

## Silkscreen, mask and mechanical layers (free items; w line width, h text height)
Top Overlay:
  drawing of 1212 lines, arcs and shapes, not listed
  text "Swarmbot" at 60,-280 h60
  text "Rev. 2" at 60,-370 h60
  text "TSC 2017" at 50,-470 h60
Mechanical 16:
  drawing of 1874 lines, arcs and shapes, not listed
  text "1" at -2943.08,4709.09 h70
  text "2" at -83.08,4709.09 h70
  text "3" at 2796.92,4709.09 h70
  text "4" at 5666.92,4709.09 h70
  text "A" at -4295.08,3803.09 h70
  text "A" at 7004.92,3803.09 h70
  text "B" at -4295.08,1911.09 h70
  text "B" at 7004.92,1911.09 h70
  text "C" at -4295.08,1.09 h70
  text "C" at 7004.92,1.09 h70
  text "ENGINEER:" at 2479.92,-1455.91 h45
  text "TITLE:" at 3979.92,-1455.91 h45
  text "PCB DESIGNER:" at 2479.92,-1750.91 h45
  text "D" at -4295.08,-1888.91 h70
  text "D" at 7004.92,-1888.91 h70
  text "DATE:" at 2479.92,-2055.91 h45
  text "PART NO.:" at 3979.92,-2055.91 h45
  text "REV:" at 6079.92,-2055.91 h45
  text "Altium Limited" at 1179.92,-2155.91 h70
  text ".PRINT_DATE" at 2529.92,-2175.91 h70
  text "12a Rodborough Rd" at 1179.92,-2255.91 h70
  text "Frenchs Forest" at 1179.92,-2355.91 h70
  text "FILE NAME:" at 2479.92,-2355.91 h45
  text "DWG NO:" at 3979.92,-2355.91 h45
  text "SCALE:" at 6079.92,-2355.91 h45
  text "NSW 2086" at 1179.92,-2455.91 h70
  text ".PCB_FILE_NAME_NO_PATH" at 2529.92,-2475.91 h70
  text "1" at -2943.08,-2690.91 h70
  text "2" at -83.08,-2690.91 h70
  text "3" at 2796.92,-2690.91 h70
  text "4" at 5666.92,-2690.91 h70

## Dimensions
3125,493 to 3060,500 on Mechanical 1
3060,500 to 3060,2250 on Mechanical 1
3800,200 to 3800,2550 on Mechanical 1
4000,-520 to 4000,3280.05 on Mechanical 1
1250,200 to 3800,200 on Mechanical 1
0,-520 to 4000,-520 on Mechanical 1

## Text inside footprints (layer, text, board x,y; h text height)
CON1: Top Overlay "1" at 390,2165 h50 r180; Top Overlay "2" at 410,2065 h50 r180; Top Overlay "5" at 50,2165 h50 r180; Top Overlay "6" at 50,2065 h50 r180
CON2: Top Overlay "1" at 390,720 h50 r180; Top Overlay "2" at 410,620 h50 r180; Top Overlay "5" at 50,720 h50 r180; Top Overlay "6" at 50,620 h50 r180
CON3: Top Overlay "12" at 1357,1027 h50 r270; Top Overlay "6" at 1257,1027 h50 r270; Top Overlay "1" at 1257,1707 h50 r270; Top Overlay "7" at 1357,1707 h50 r270
CON4: Top Overlay "8" at 930,80 h50 r270; Top Overlay "7" at 830,80 h50 r270; Top Overlay "1" at 830,520 h50 r270; Top Overlay "2" at 930,540 h50 r270
CON5: Top Overlay "60" at 770,3040 h50 r180; Top Overlay "59" at 770,3140 h50 r180; Top Overlay "1" at 3850,3140 h50 r180; Top Overlay "2" at 3850,3040 h50 r180; Bottom Overlay "1" at 3760,3230 h50 r180
CON6: Top Overlay "60" at 770,-340 h50 r180; Top Overlay "59" at 770,-240 h50 r180; Top Overlay "1" at 3850,-240 h50 r180; Top Overlay "2" at 3850,-340 h50 r180; Bottom Overlay "1" at 3760,-130 h50 r180
P3: Top Overlay "+9VDC" at 387,1843.5 h40